# Altium PCB Pr7.PcbDoc
Units mil, origin at the board's own origin, x right, y up, seen from the top; angles counter-clockwise.
Board outline 6000 x 4000 mil, 2 copper layers (Top Layer, Bottom Layer); 17 components, 14 nets, 55 pads, 4 vias.
Unrouted connection lines stored in the file: 1.
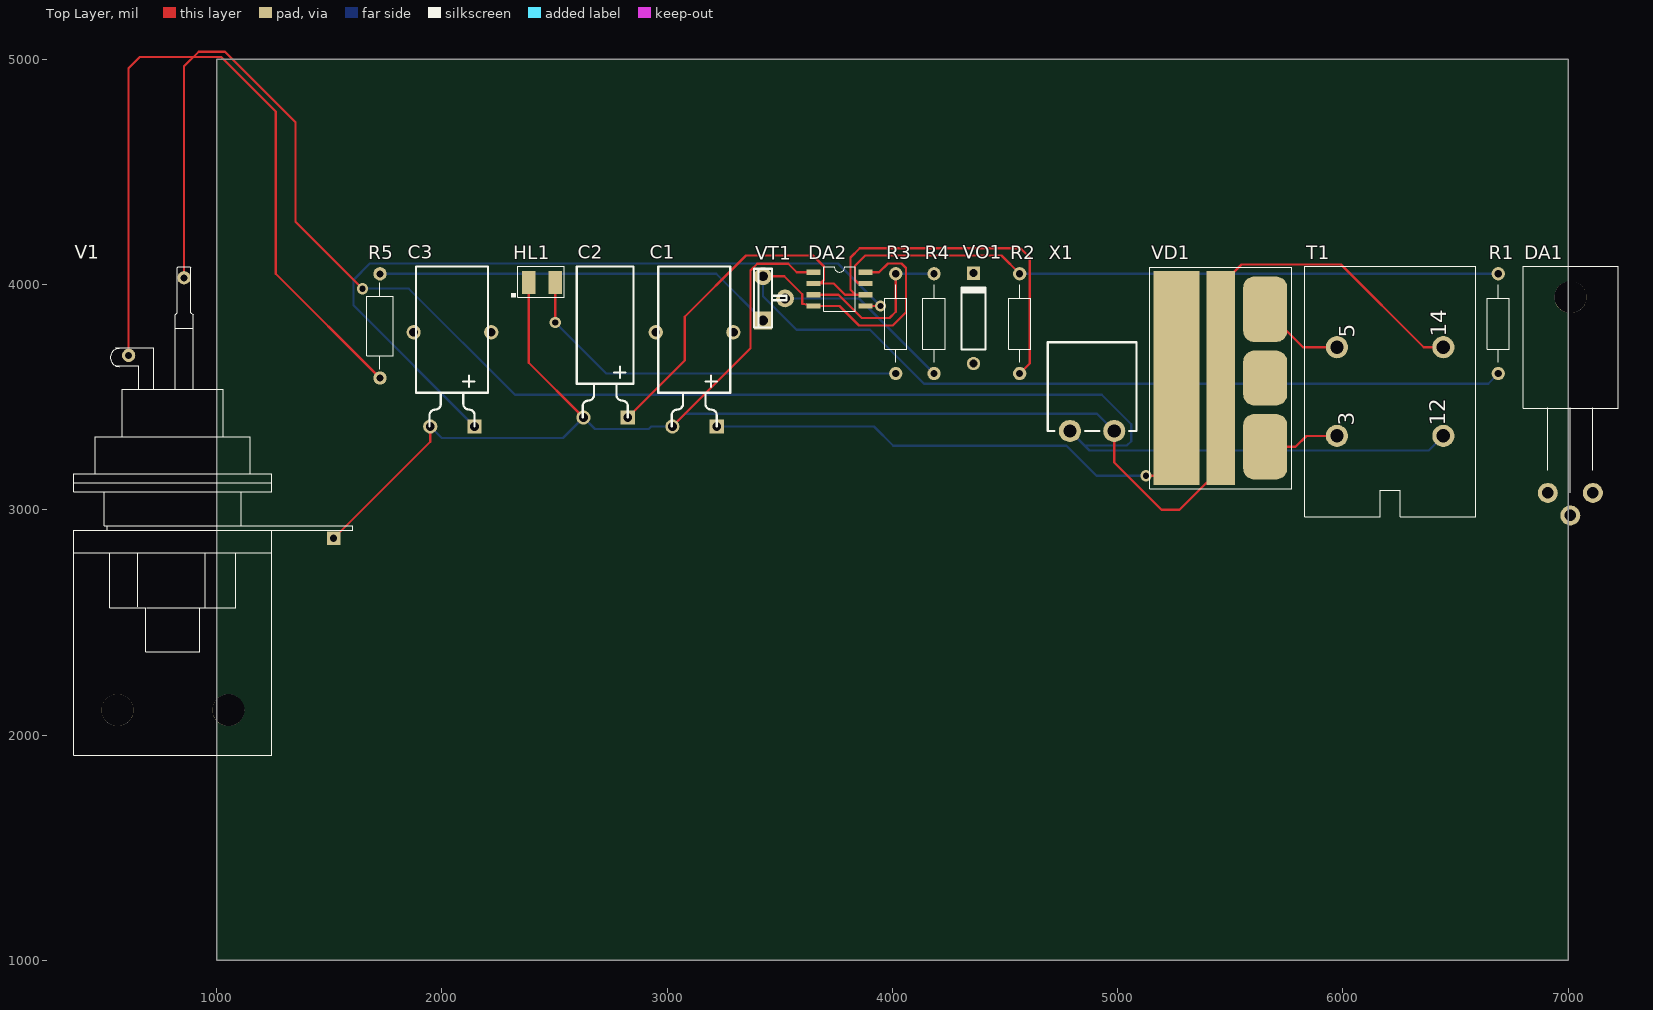
[diagram p0: Top Layer view]
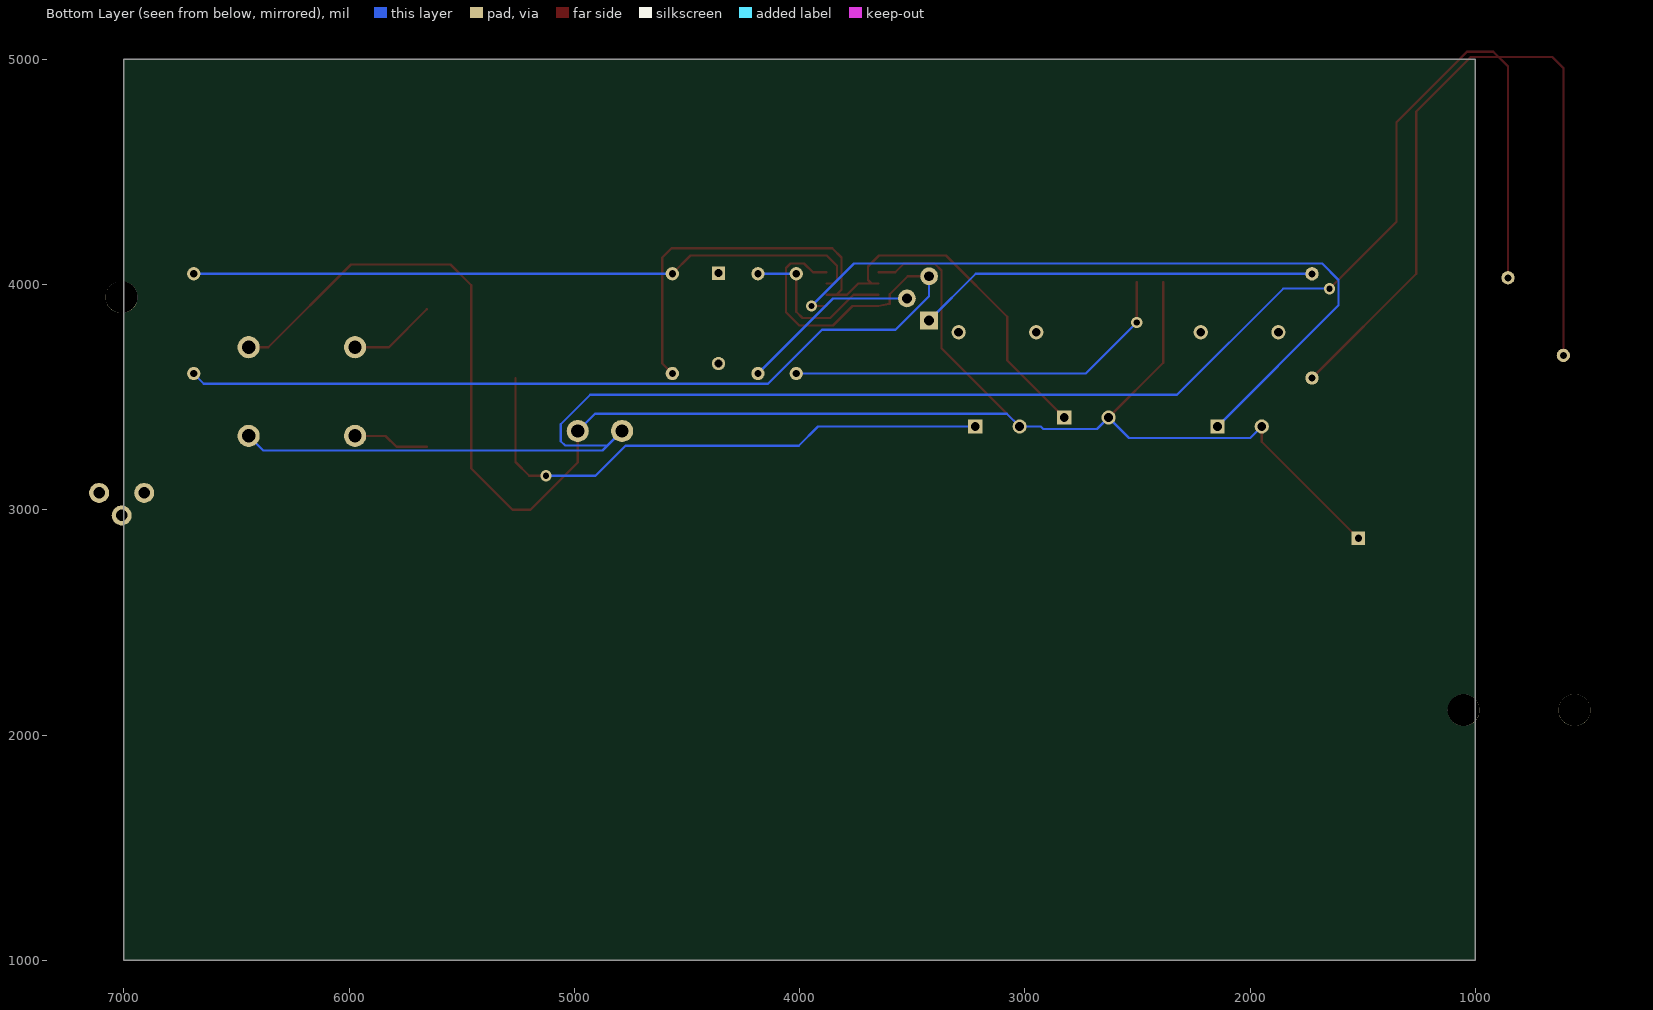
[diagram p1: Bottom Layer view, seen from below]

## Layer stack, top to bottom
Top Solder: solder mask 0.4, Solder Resist, Dk 3.5
Top Layer: signal copper 1.4
Dielectric 1: dielectric 12.6, FR-4, Dk 4.8
Bottom Layer: signal copper 1.4
Bottom Solder: solder mask 0.4, Solder Resist, Dk 3.5

## Board outline
1000,1000 7000,1000 7000,5000 1000,5000

## Design rules (kind name [scope] priority, off if disabled: settings)
Clearance [All] p1: gap=10 ignorepadtopadclearanceinfootprint=FALSE except(0: Arc-Hole Track-Hole SMDPad-Hole THPad-Hole Via-Hole Fill-Hole Poly-Hole Region-Hole Text-Hole)
PolygonConnect [All] p1: connectstyle=Relief reliefconductorwidth=10 reliefentries=4 polygonreliefangle="90 Angle" airgapwidth=10
RoomDefinition Pr7 [InComponentClass('Pr7')] p1: confinementstyle=ConfineIn formatcopy=TRUE lockcomponents=FALSE outline 355,1900 7235,1900 7235,4190 355,4190
RoutingVias [All] p1: holewidth=28 width=50 viastyle="Through Hole" minholewidth=28 minwidth=50 maxholewidth=28 maxwidth=50
SolderMaskExpansion [All] p1: expansion=4
Width [All] p1: maxlimit=10 minlimit=10 preferedwidth=10
30 further rules are at their usual default settings.

## Classes and differential pairs
component class Pr7: C1 C2 C3 T1 V1 VT1

## Components (designator, comment, footprint, x,y, rotation, side; value= is the part's Value field where it differs from the comment)
C1 "К50-35-470МКФ-10В" R50-35-08XX_K5035-2R 3220,3370 r90 top value=470mk
C2 "К50-35-1МКФ-50В" К50-35-0511_K5035-1R 2825,3410 r90 top value=1mk
C3 "К50-35-0,1МКФ-50В" К50-35-08XX-Г_K5035-2R 2145,3370 r90 top value=0,1mk
DA1 "КР142ЕН5А" TO-220-KT-28-2 6910,3075 r0 top
DA2 "LM555CM" SO-8 3650,4055 r0 top
HL1 "ИПД156" 3528 2385,4010 r0 top
R1 "C2-33H-0.125W_OLD_UGO" C2-33H-0.125W 6690,3605 r90 top value=470k
R2 "C2-33H-0.125W_OLD_UGO" C2-33H-0.125W 4565,3605 r90 top value=470k
R3 "C2-33H-0.125W_OLD_UGO" C2-33H-0.125W 4015,3605 r90 top value=220
R4 "C2-33H-0.125W_OLD_UGO" C2-33H-0.125W 4185,3605 r90 top value=130
R5 "C2-33H-0.25W_OLD_UGO" C2-33H-0.25W 1725,3585 r90 top value=56
T1 "TRANS_1" TRANS_1_TRANS_1(Primary) 6210,3525 r90 top
V1 "TC122" КУ202_КУ202А(Primary) 855,4030 r90 top
VD1 "2Д2136АС" 2Д2136АС 5655,3280 r90 top
VO1 "1N34" DO-7 4360,3850 r90 top
VT1 "КТ315Б" KT13_КТ315Б(KT13-1) 3425,3840 r0 top
X1 "2XR" 2XR 4985,3350 r90 top value="~220 V"

## Footprints (in the part's own frame and the unit in brackets; to place one, negate y for a bottom-side part, rotate by r counter-clockwise, add the part's x,y. Pads: shape width x height; smd on the part's side, far side on the other; paste and mask are expansions set on the pad)
2XR [mm]
  round 2.5 hole 1.5: 1(0,0) 2(0,5)
  silkscreen extent 0,-2.5 10,7.5
2Д2136АС [mm]
  rrect50% 7.4x4.96 smd: 1(0,0) 3(15.5,0)
  rrect50% 6.2x4.96 smd: 2(7.75,0)
  rect 24.1x3.2 smd: 4(7.75,5)
  rect 24.1x5.14 smd: 5(7.75,10)
  silkscreen extent -4.75,-3 20.25,13
3528 [mm]
  rect 1.5x2.6 smd: 1(0,0) 2(3,0)
  silkscreen extent -1.96,-1.71 4.04,1.79
C2-33H-0.25W [mm]
  round 1.5 hole 0.8: 1(0,0) 2(11.75,0)
  silkscreen extent 1,-1.5 10.75,1.5
C2-33H-0.125W [mm]
  round 1.5 hole 0.8: 1(0,0) 2(11.25,0)
  silkscreen extent 1.25,-1.25 10,1.25
DO-7 [mm] "Diode, Axial; Body 7 x 2.7 mm (LxDia. max), Lead Dia. 0.53 mm (max)"
  round 1.5 hole 0.9: 1(-5.1,0)
  rect 1.5x1.5 hole 0.9: 2(5.1,0)
  silkscreen extent -3.5,-1.35 3.6,1.35
KT13_КТ315Б(KT13-1) [mm]
  rect 2x2 hole 1.1: 1(0,0)
  round 2 hole 1.1: 2(2.5,2.5) 3(0,5)
  silkscreen extent -1.02,-0.76 2.67,5.84
R50-35-08XX_K5035-2R [mm]
  rect 1.6x1.6 hole 1: 1(0,0)
  round 1.6 hole 1: 2(0,5) 3(10.625,6.875) 4(10.625,-1.875)
  silkscreen extent 0,-1.52 18.03,6.6
SO-8 [mm]
  rect 1.55x0.6 smd: 1(0,0) 2(0,-1.27) 3(0,-2.54) 4(0,-3.81) 5(5.85,-3.81) 6(5.85,-2.54) 7(5.85,-1.27) 8(5.85,0)
  silkscreen extent 1.18,-4.41 4.68,0.6
TO-220-KT-28-2 [mm]
  round 2.25 hole 1.3: 1(0,0) 2(2.54,-2.54) 3(5.08,0)
  round 3.6 hole 3.6 unplated: 4(2.55,22.07)
  silkscreen extent -2.8,0 7.95,25.57
TRANS_1_TRANS_1(Primary) [mm]
  round 2.5 hole 1.5: 3(-5,6) 5(5,6) 12(-5,-6) 14(5,-6)
  silkscreen extent -14.13,-9.63 14.13,9.63
К50-35-08XX-Г_K5035-2R [mm]
  rect 1.6x1.6 hole 1: 1(0,0)
  round 1.6 hole 1: 2(0,5) 3(10.625,6.875) 4(10.625,-1.875)
  silkscreen extent 0,-1.52 18.03,6.6
К50-35-0511_K5035-1R [mm]
  rect 1.6x1.6 hole 1: 1(0,0)
  round 1.6 hole 1: 2(0,5)
  silkscreen extent 0,-0.66 17.02,5.74
КУ202_КУ202А(Primary) [mm]
  rect 1.5x1.5 hole 0.8: 1(-29.375,-16.875)
  round 1.5 hole 0.8: 2(0,0) UE(-8.75,6.25)
  round 3.6 hole 3.6 unplated: 4(-48.75,7.5) 5(-48.75,-5)
  silkscreen extent -53.85,-19.05 1.27,12.45

## Part data
R1 R2 R3 R4 R5: Autor=pcbdesigner.ru

## Via types
v1: diameter 50, hole 28, Top Layer to Bottom Layer, 4 vias

## Nets (pads, with @x,y where several pads share a name; then routed paths per layer and width w, separated by ;. In a path a pad name is that pad's centre, name@x,y a point inside that pad or via, vN(x,y) a via of type N, cw(c..) or ccw(c..) an arc to the next point about the centre after c; other vN are vias at no path point)
NetC1_1: C1.1 VD1.5 | length 2530.6
  Top Layer w10: v1(5126.3,3150.7) 5200,3150.7 5261.3,3212 VD1.5
  Bottom Layer w10: C1.1 3918,3370 4004,3284 4773,3284 4906.3,3150.7 v1(5126.3,3150.7)
NetC1_2: C1.2 C2.2 C3.2 DA2.1 HL1.1 T1.14 V1.1 VD1.4 X1.1 | length 8463.2
  Top Layer w10: V1.1 1948.15,3302.28 C3.2 ; HL1.1 2385,3653.15 C2.2 ; C1.2 3370,3716.85 3370,4062 3400,4092 3538,4092 3575,4055 DA2.1 ; X1.1 4985,3210.15 5195.15,3000 5275.15,3000 5458.15,3183 VD1.4 5458.15,3997 5550.15,4089 5992,4089 6359.15,3721.85 T1.14
  Bottom Layer w10: C3.2 1999.15,3319 2537.15,3319 C2.2 2679.15,3359 2918,3359 2929,3370 C1.2 3080.15,3427 4908,3427 X1.1
NetC2_1: C2.1 DA2.2 DA2.6 R2.1 | length 3172.7
  Top Layer w10: C2.1 3078,3663 3078,3857 3350,4129 3647,4129 3696,4080 3696,4020 3681,4005 ; DA2.2 3681,4005 ; DA2.6 3836,3955 ; R2.1 4610,3650 4610,4120 4569,4161 3855,4161 3814,4120 3814,3977 3836,3955 ; 3681,4005 3740,4005 3790,3955 3836,3955
NetC3_1: C3.1 DA2.5 | length 3387.6
  Top Layer w10: DA2.5 v1(3947,3905)
  Bottom Layer w10: C3.1 1607,3908 1607,4020 1680,4093 3759,4093 v1(3947,3905)
NetDA1_2: DA1.2 DA2.4 DA2.8 R1.1 VT1.3 | length 4705.8
  Top Layer w10: VT1.3 3520,4036.85 3600,3956.85 3600,3915 DA2.4 3765,3905 3852,3818 4001,3818 4060,3877 4060,4074 4040,4094 3980,4094 3941,4055 DA2.8
  Bottom Layer w10: VT1.3 3425,3948 3573.75,3799.25 3900.75,3799.25 4140,3560 6645,3560 R1.1
NetDA2_3: DA2.3 R3.2 R4.2 | length 757.4
  Top Layer w10: DA2.3 3761,3955 3864.1,3851.9 3987.07,3851.9 4015,3879.84 R3.2
  Bottom Layer w10: R3.2 R4.2
NetDA2_7: DA2.7 R1.2 R2.2 | length 3024.2
  Top Layer w10: DA2.7 3849,4005 3834,4020 3834,4083 3880,4129 4483.91,4129 R2.2
  Bottom Layer w10: R2.2 R1.2
NetHL1_2: HL1.2 R3.1 | length 1784
  Top Layer w10: v1(2503.11,3831.89) HL1.2
  Bottom Layer w10: v1(2503.11,3831.89) 2730,3605 R3.1
NetR4_1: R4.1 VT1.2 | length 799.7
  Bottom Layer w10: VT1.2 3851.57,3938.43 R4.1
NetR5_1: R5.1 V1.UE | length 3423.3
  Top Layer w10: V1.UE 608.94,4960 658.94,5010 1020,5010 1262,4768 1262,4048 R5.1
NetR5_2: R5.2 VT1.1 | length 1786
  Bottom Layer w10: R5.2 3217.4,4047.6 VT1.1
NetT1_3: T1.3 VD1.1 | length 338.7
  Top Layer w10: VD1.1 5790,3280 5838.15,3328.15 T1.3
NetT1_5: T1.5 VD1.3 | length 388.5
  Top Layer w10: VD1.3 5823.39,3721.85 T1.5
NetT1_12: T1.12 V1.2 X1.2 | length 8126.8
  Top Layer w10: V1.2 855,4969 920,5034 1037,5034 1350,4721 1350,4279 v1(1647,3982)
  Bottom Layer w10: v1(1647,3982) 1853,3982 2324,3511 4929,3511 5060,3380 5060,3304 5041,3285 4853.15,3285 ; X1.2 4853.15,3285 ; T1.12 6381.07,3263 4875.15,3263 4853.15,3285
pads on no net: C1.3 C1.4 C3.3 C3.4 DA1.1 DA1.3 DA1.4 V1.4 V1.5 VD1.2 VO1.1 VO1.2

## Text inside footprints (layer, text, board x,y; h text height)
T1: Top Overlay "3" at 6051.34,3374.21 h69.44 r90; Top Overlay "5" at 6052.52,3763.58 h69.44 r90; Top Overlay "12" at 6455.67,3374.21 h69.44 r90; Top Overlay "14" at 6458.03,3768.31 h69.44 r90